# Altium PCB IGN-101.PcbDoc
Units mm, origin at the board's own origin, x right, y up, seen from the top; angles counter-clockwise.
Board outline 57.5 x 34.4 mm, 2 copper layers (Top Layer, Bottom Layer); 4 components, 6 nets, 30 pads, 0 vias.
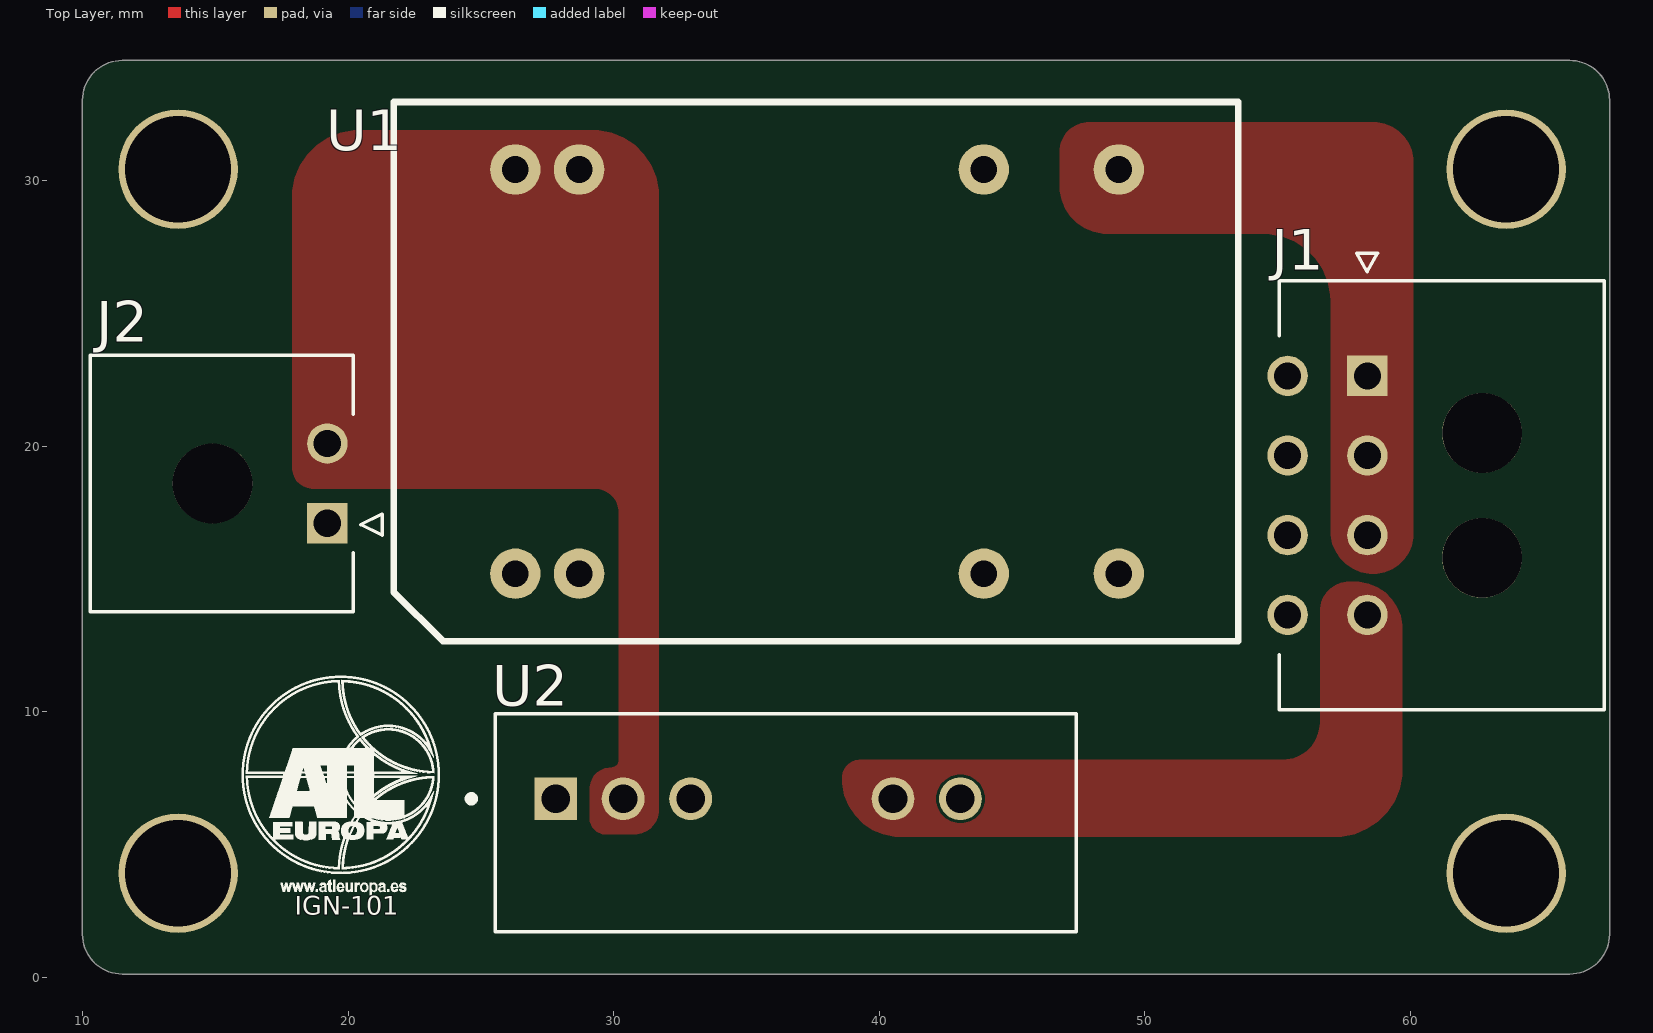
[diagram p0: Top Layer view]
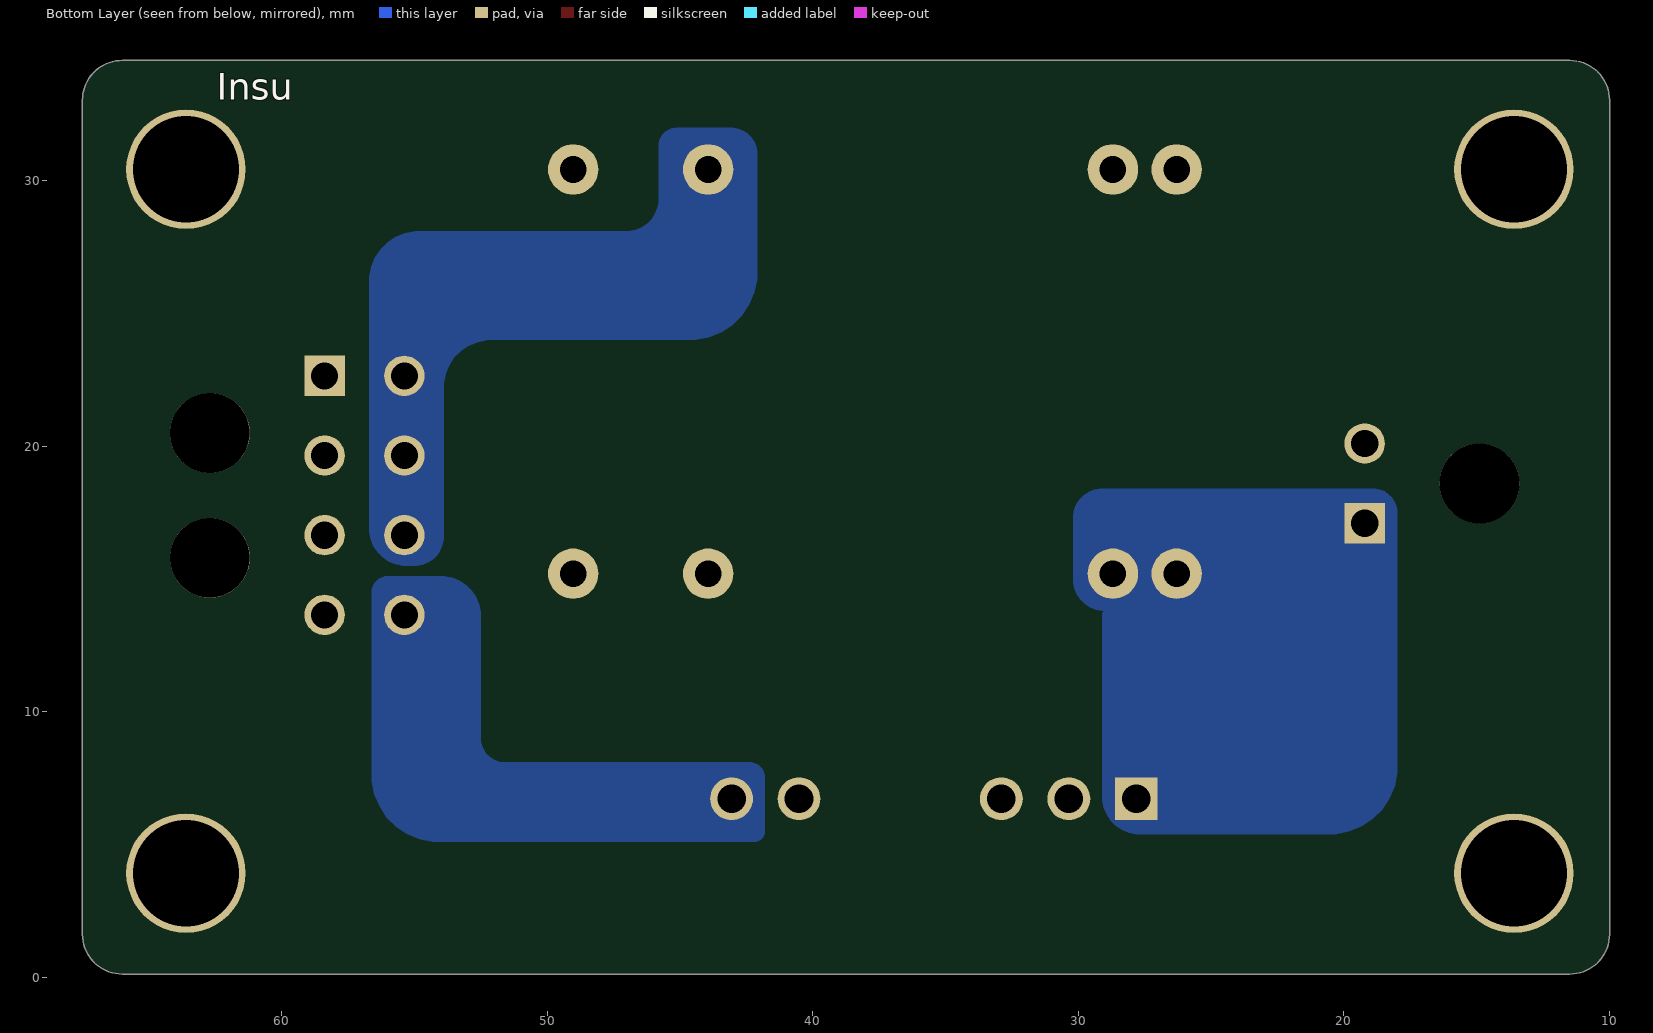
[diagram p1: Bottom Layer view, seen from below]
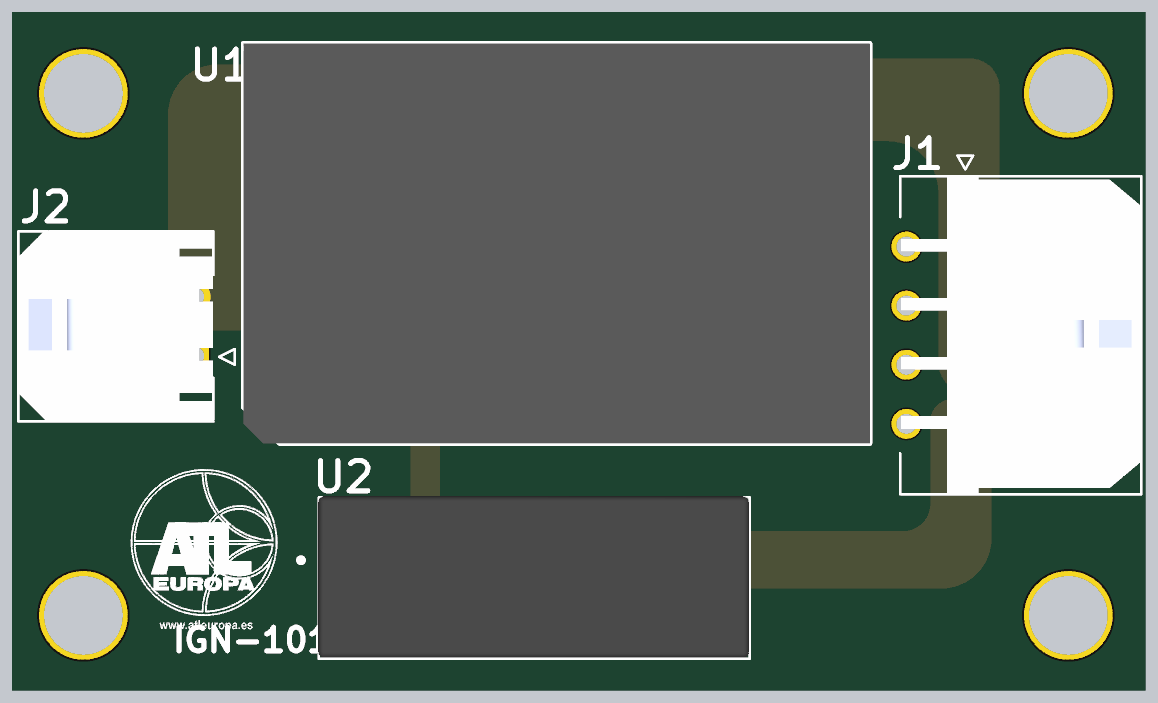
[diagram p2: 3D render of the assembled board from above, using the file's embedded part models]

## Layer stack, top to bottom
Top Solder: solder mask 0.0102, Solder Resist, Dk 3.5
Top Layer: signal copper 0.0356
Dielectric 1: dielectric 0.32, FR-4, Dk 4.8
Bottom Layer: signal copper 0.0356
Bottom Solder: solder mask 0.0102, Solder Resist, Dk 3.5

## Board outline
10,1.627 ccw(c11.5,1.627) 11.5,0.127 66,0.127 ccw(c66,1.627) 67.5,1.627 67.5,33.027 ccw(c66,33.027) 66,34.527 11.5,34.527 ccw(c11.5,33.027) 10,33.027

## Design rules (kind name [scope] priority, off if disabled: settings)
Clearance [All] p1: gap=0.1 ignorepadtopadclearanceinfootprint=FALSE
DiffPairsRouting RS485_DiffPairsRouting [InDifferentialPair('RS485')] p1: maxlimit=0.25 minlimit=0.25 mostfreqgap=0.25 toplayer_minwidth=0.14 toplayer_maxwidth=0.14 toplayer_prefwidth=0.14 bottomlayer_minwidth=0.14 bottomlayer_maxwidth=0.14 bottomlayer_prefwidth=0.14 impedanceprofiledriven=TRUE impedanceprofileid={EB7CAB6C-5A75-4A25-BDF9-6303107E11B5} maxuncoupledlength=15.24
DiffPairsRouting USB_DiffPairRouting [InDifferentialPair('USB_D')] p2: maxlimit=0.254 minlimit=0.127 mostfreqgap=0.127 toplayer_minwidth=0.205 toplayer_maxwidth=0.213 toplayer_prefwidth=0.205 bottomlayer_minwidth=0.205 bottomlayer_maxwidth=0.213 bottomlayer_prefwidth=0.205 maxuncoupledlength=15.24
HoleSize HoleSize_Pad [IsPad] p1: absolutevalues=TRUE maxlimit=2539.975 minlimit=0.5 maxpercent=80.000 minpercent=20.000
HoleSize HoleSize_Via [IsVia] p2: absolutevalues=TRUE maxlimit=6.3 minlimit=0.015 maxpercent=80.000 minpercent=20.000
HoleToHoleClearance [All] p1: gap=0.2 allowstackedmicrovias=TRUE
MinimumSolderMaskSliver [All] p1: minsoldermaskwidth=0.1
PlaneConnect [All] p1: planeconnectstyle=Direct reliefexpansion=0.508 reliefentries=4 reliefconductorwidth=0.254 reliefairgap=0.254
PolygonConnect [All] p1: connectstyle=Direct reliefconductorwidth=0.254 reliefentries=4 polygonreliefangle="90 Angle" airgapwidth=0.254
RoutingVias [(InNet('K1') OR InNet('K2') OR InNet('K3') OR InNet('K4') OR InNet('K5') OR InNet('K6') OR InNet('K7') OR InNet('K8') OR InNet('K9') OR InNet('K10') OR InNet('K11') OR InNet('K12'))] p1: holewidth=0.3 width=0.4 viastyle="Through Hole" minholewidth=0.3 minwidth=0.4 maxholewidth=0.3 maxwidth=0.4
RoutingVias RoutingViasJLCPCB [All] p2: holewidth=0.5 width=0.65 viastyle="Through Hole" minholewidth=0.2 minwidth=0.35 maxholewidth=0.711 maxwidth=1.27
SilkToSilkClearance [All] p1: silktosilkclearance=0.1
SilkToSolderMaskClearance [IsPad] p1: minsilkscreentomaskgap=0.1 clearancetoexposedcopper=TRUE
SolderMaskExpansion [All] p1: expansion=0.102 istentingtop=FALSE
UnRoutedNet [All] p1: checkbadconnections=TRUE
Width "3A Width" [InNet('NetJ5_1') OR InNet('VIN')] p1: maxlimit=1.27 minlimit=1.27 preferedwidth=1.27 // Width necessary for 3A
Width [All] p2: maxlimit=0.5 minlimit=0.1 preferedwidth=0.254
22 further rules are at their usual default settings.

## Components (designator, comment, footprint, x,y, rotation, side; value= is the part's Value field where it differs from the comment)
J1 "430450800" MOLEX_430450800 58.38,22.65 r90 top
J2 "436500200" MOLEX_436500200 19.22,17.1 r270 top
U1 "DJ06S2424A" DJ06S2424A 21.72,12.66 r0 top
U2 "NCS1S2405SC" CONV_NCS1S1203SC 27.82,6.727 r0 top

## Footprints (in the part's own frame and the unit in brackets; to place one, negate y for a bottom-side part, rotate by r counter-clockwise, add the part's x,y. Pads: shape width x height; smd on the part's side, far side on the other; paste and mask are expansions set on the pad)
CONV_NCS1S1203SC [mm]
  rect 1.613x1.613 hole 1.075: 1(0,0)
  round 1.613 hole 1.075: 2(2.54,0) 3(5.08,0) 6(12.7,0) 7(15.24,0)
  silkscreen extent -3.22,-5 19.6,3.19, body extent -2.3,-4.95 19.57,3.25, height 11.3
DJ06S2424A [mm]
  round 1.9 hole 1: 2(4.58,2.54) 3(6.98,2.54) 9(22.22,2.54) 11(27.3,2.54) 14(27.3,17.76) 16(22.22,17.76) 22(6.98,17.76) 23(4.58,17.76)
  silkscreen extent 0,0 31.8,20.3, body extent 0,0 31.8,20.3, height 10.2
MOLEX_430450800 [mm]
  rect 1.52x1.52 / inner round 1.52 / far side rect 1.52x1.52 hole 1.02 mask+0.076: 1(0,0)
  round 1.52 hole 1.02 mask+0.076: 2(-3,0) 3(-6,0) 4(-9,0) 5(0,3) 6(-3,3) 7(-6,3) 8(-9,3)
  round 3 hole 3 unplated mask+0.076: ""(-6.85,-4.32) ""(-2.15,-4.32)
  silkscreen extent -12.57,-8.92 4.62,3.32, body extent -12.5,-8.97 3.65,3.27, height 8.77
MOLEX_436500200 [mm]
  rect 1.52x1.52 / inner round 1.52 / far side rect 1.52x1.52 hole 1.02 mask+0.076: 1(0,0)
  round 1.52 hole 1.02 mask+0.076: 2(-3,0)
  round 3 hole 3 unplated mask+0.076: ""(-1.5,-4.32)
  silkscreen extent -6.32,-8.92 3.32,2.06, body extent -6.4,-8.95 3.25,0.95, height 5.57

## Part data
J1: "Conn 8 Position Throught Hole Dual Row ,Right Angle", Package=None, Availability=Unavailable, EU_RoHS_Compliance=Compliant, MF="TE Connectivity", MP=3-794637-8, Price=None, SnapEDA_Link=https://www.snapeda.com/parts/3-794637-8/TE%20Connectivity%20AMP%20Connectors/view-part/2381525/?ref=snap, TE_purchase_URL=https://www.te.com/usa-en/product-3-794637-8.html?te_bu=Cor&te_type=disp&te_campaign=seda_glo_cor-seda-global-disp-prtnr-fy19-seda-model-bom-cta_sma-317_1&elqCampaignId=32493
J2: "Connector Molex 2 Pins Right Angle", Package=None, Availability=Unavailable, MP=436500200, Price=None
U1: "Convertidores CC/CC aislados (orificio pasante) DC/DC Converter, 24Vout, 6W"
U2: "Convertidores CC/CC aislados (orificio pasante) 1W 24VIN 5VOUT DC/DC"

## Free pads (board coordinates)
  round 4.5 hole 4: P(13.6,3.927) P(13.6,30.427) P(63.6,3.927) P(63.6,30.427)

## Nets (pads, with @x,y where several pads share a name; then routed paths per layer and width w, separated by ;. In a path a pad name is that pad's centre, name@x,y a point inside that pad or via, vN(x,y) a via of type N, cw(c..) or ccw(c..) an arc to the next point about the centre after c; other vN are vias at no path point)
Vin+: J2.2 U1.22 U1.23 U2.2
Vin-: J2.1 U1.2 U1.3 U2.1
Vout+_5v: J1.4 U2.6
Vout+_24v: J1.1 J1.2 J1.3 U1.14
Vout-_5v: J1.8 U2.7
Vout-_24v: J1.5 J1.6 J1.7 U1.16
pads on no net: J1. J2. U1.9 U1.11 U2.3

## Polygon pours and split planes (outlines as drawn)
Vout+_5v on Top Layer "VOUT+_5V_L01_P012" (solid, pour order 12): 57.9,14.9 cw(c57.9,13.1) 59.7,13.1 59.7,7.84 cw(c57.16,7.84) 57.16,5.3 40.8,5.3 cw(c40.8,7.5) 38.6,7.5 cw(c39.3,7.5) 39.3,8.2 55.2,8.2 ccw(c55.2,9.6) 56.6,9.6 56.6,13.8 cw(c57.7,13.8) 57.7,14.9
Vout+_24v on Top Layer "VOUT+_24V_L01_P006" (solid, pour order 6): 47.9,32.2 ccw(c47.9,31.1) 46.8,31.1 46.8,29.8 ccw(c48.6,29.8) 48.6,28 54.46,28 cw(c54.46,25.46) 57,25.46 57,16.8 ccw(c58.6,16.8) 58.6,15.2 ccw(c58.6,16.7) 60.1,16.7 60.1,30.7 ccw(c58.6,30.7) 58.6,32.2
Vin+ on Top Layer "VIN+_L01_P003" (solid, pour order 3): 29.1,6 ccw(c29.7,6) 29.7,5.4 30.8,5.4 ccw(c30.8,6.3) 31.7,6.3 31.7,29.4 ccw(c29.2,29.4) 29.2,31.9 20.44,31.9 ccw(c20.44,29.36) 17.9,29.36 17.9,19.2 ccw(c18.7,19.2) 18.7,18.4 29.3,18.4 cw(c29.3,17.5) 30.2,17.5 30.2,8.2 cw(c29.9,8.2) 29.9,7.9 ccw(c29.9,7.1) 29.1,7.1
Vout-_5v on Bottom Layer "VOUT-_5V_L02_P011" (solid, pour order 11): 42.4,8.1 ccw(c42.4,7.5) 41.8,7.5 41.8,5.5 ccw(c42.2,5.5) 42.2,5.1 54.06,5.1 ccw(c54.06,7.64) 56.6,7.64 56.6,14.5 ccw(c56,14.5) 56,15.1 54,15.1 ccw(c54,13.6) 52.5,13.6 52.5,9 cw(c51.6,9) 51.6,8.1
Vout-_24v on Bottom Layer "VOUT-_24V_L02_P009" (solid, pour order 9): 55.3,15.5 ccw(c55.3,16.9) 56.7,16.9 56.7,26.2 ccw(c54.8,26.2) 54.8,28.1 47,28.1 cw(c47,29.3) 45.8,29.3 45.8,31.3 ccw(c45.1,31.3) 45.1,32 43.1,32 ccw(c43.1,31) 42.1,31 42.1,26.54 ccw(c44.64,26.54) 44.64,24 52.1,24 cw(c52.1,22.2) 53.9,22.2 53.9,16.6 ccw(c55,16.6) 55,15.5
Vin- on Bottom Layer "VIN-_L02_P000" (solid, pour order 0): 18,7.94 ccw(c20.54,7.94) 20.54,5.4 27.7,5.4 ccw(c27.7,6.8) 29.1,6.8 29.1,13.7 ccw(c29,13.7) 29,13.8 ccw(c29,15) 30.2,15 30.2,17.3 ccw(c29.1,17.3) 29.1,18.4 18.9,18.4 ccw(c18.9,17.5) 18,17.5

## Silkscreen, mask and mechanical layers (free items; w line width, h text height)
Top Overlay:
  drawing of 21 lines, arcs and shapes, not listed
  text "IGN-101" at 18,2.114 h1.2
Bottom Overlay:
  text "Insu" at 62.446,33.054 h1
Mechanical 1:
  the board outline again, w0.254

## Text inside footprints (layer, text, board x,y; h text height)
J1: Mechanical 13 "MAX" at 72.16,10.33 h1.02 r90; Mechanical 13 "PCB EDGE" at 72.86,26.65 h0.81 r90
J2: Mechanical 13 "PTH D1.02 +/-0.05" at 23.73,24.6 h0.5 r270; Mechanical 13 "NPTH D3.00 +/-0.05" at 22.98,24.6 h0.5 r270; Mechanical 13 "PCB Edge" at 2.71,22.18 h1.27 r270; Mechanical 13 "MAX" at 5.25,23.45 h1 r270